# Altium PCB Drude-panel.PcbDoc
Units mm, origin at the board's own origin, x right, y up, seen from the top; angles counter-clockwise.
Board outline 151.98 x 85.9 mm, 4 copper layers (Top Layer, GND, Supply, Bottom Layer), stack 1.52 mm thick; 8 components, 0 nets, 12 pads, 0 vias.
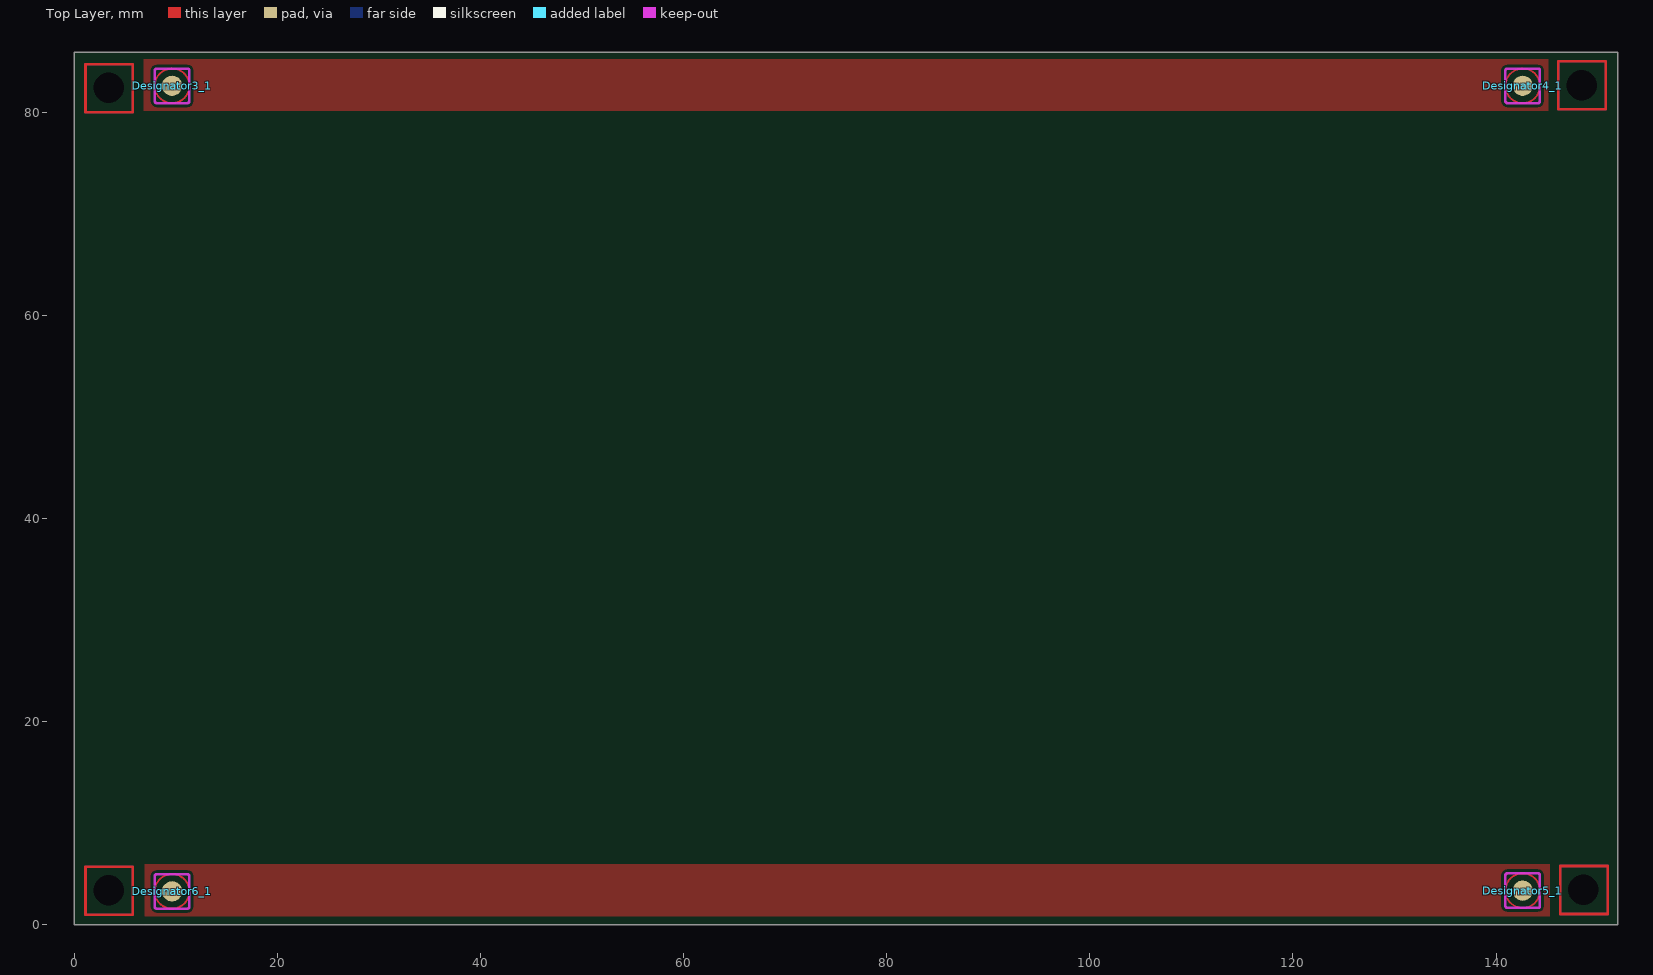
[diagram p0: Top Layer view]
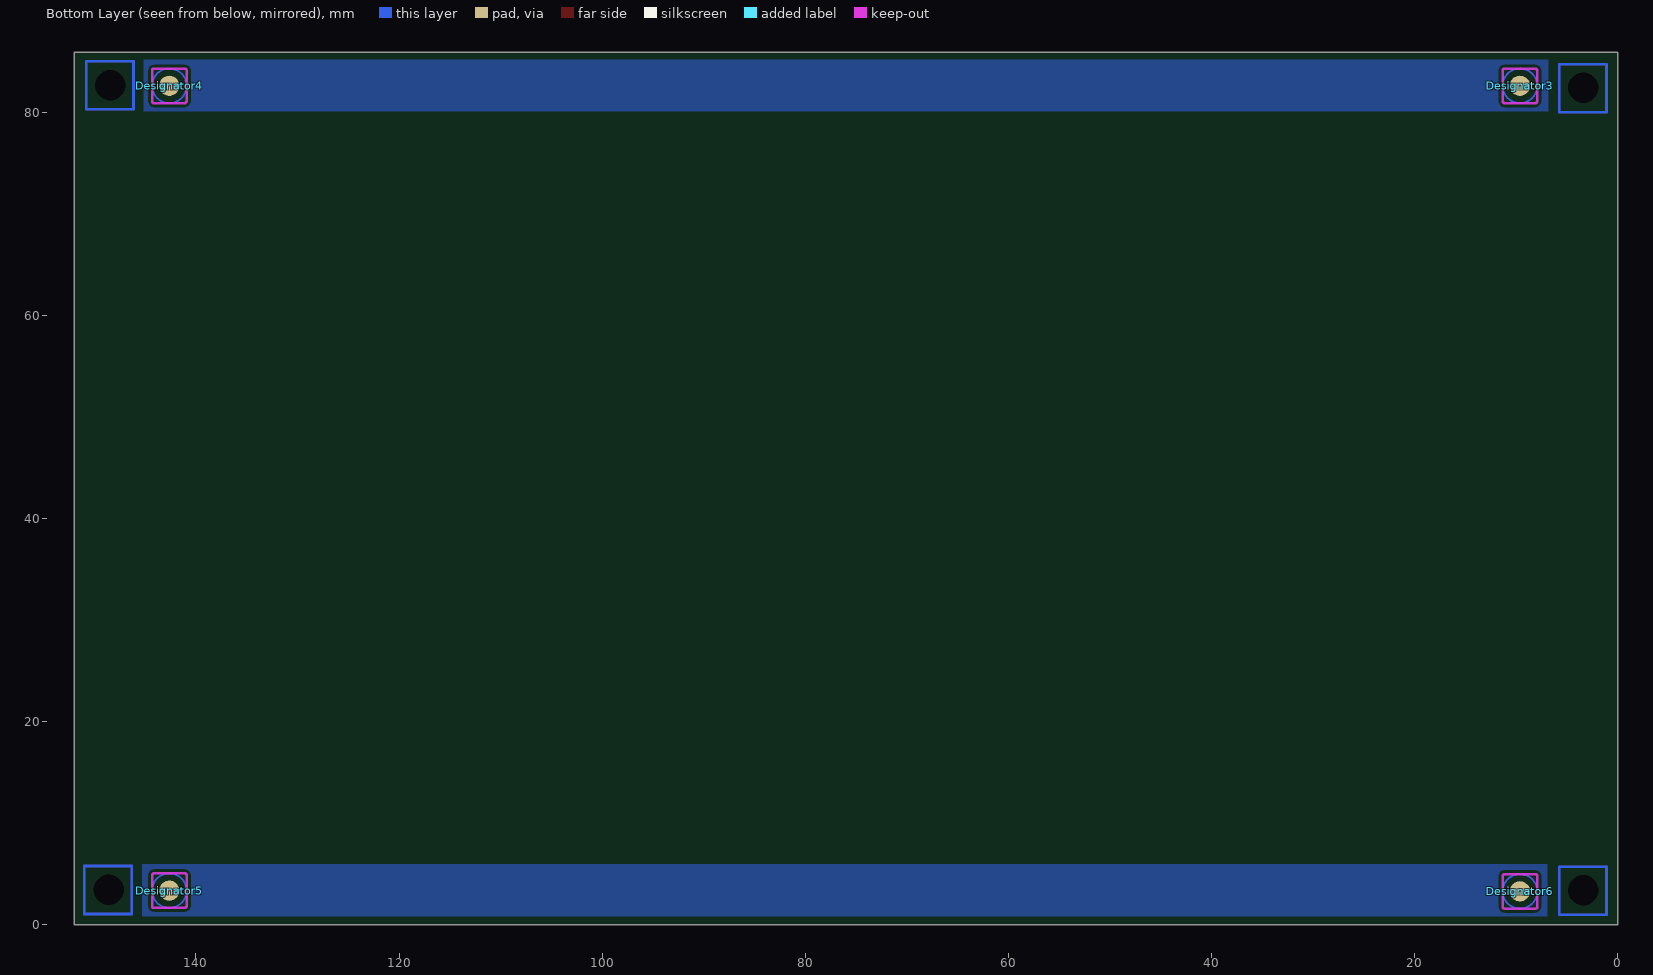
[diagram p1: Bottom Layer view, seen from below]
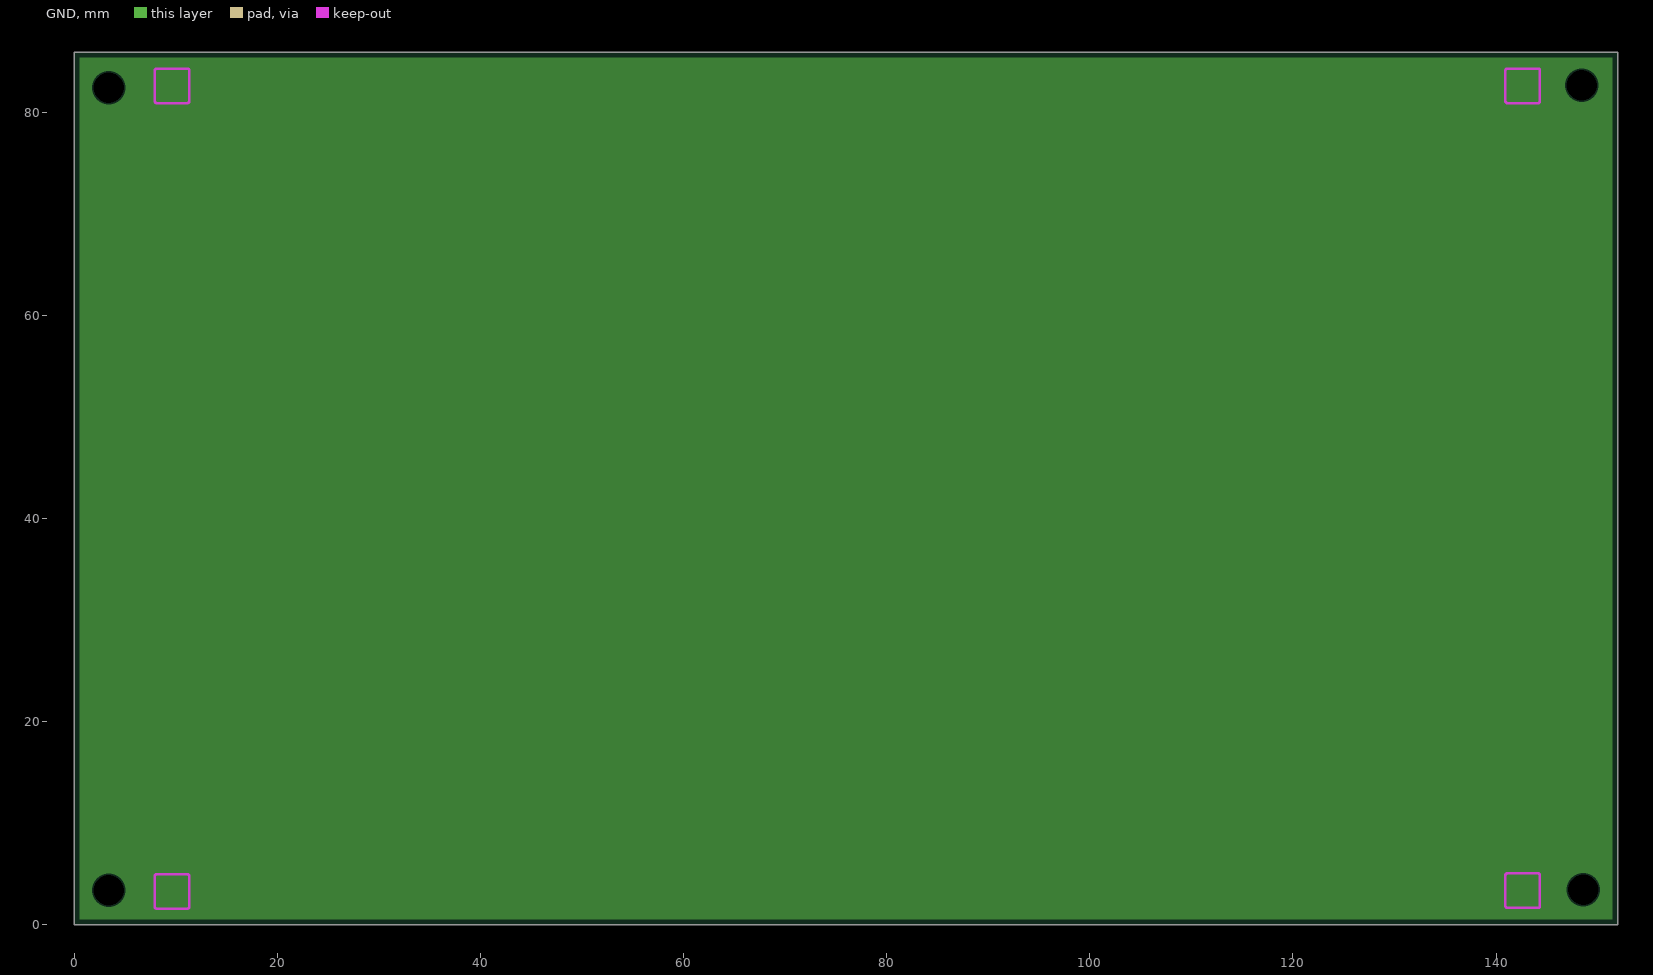
[diagram p2: GND, clearances drawn from the general rule]
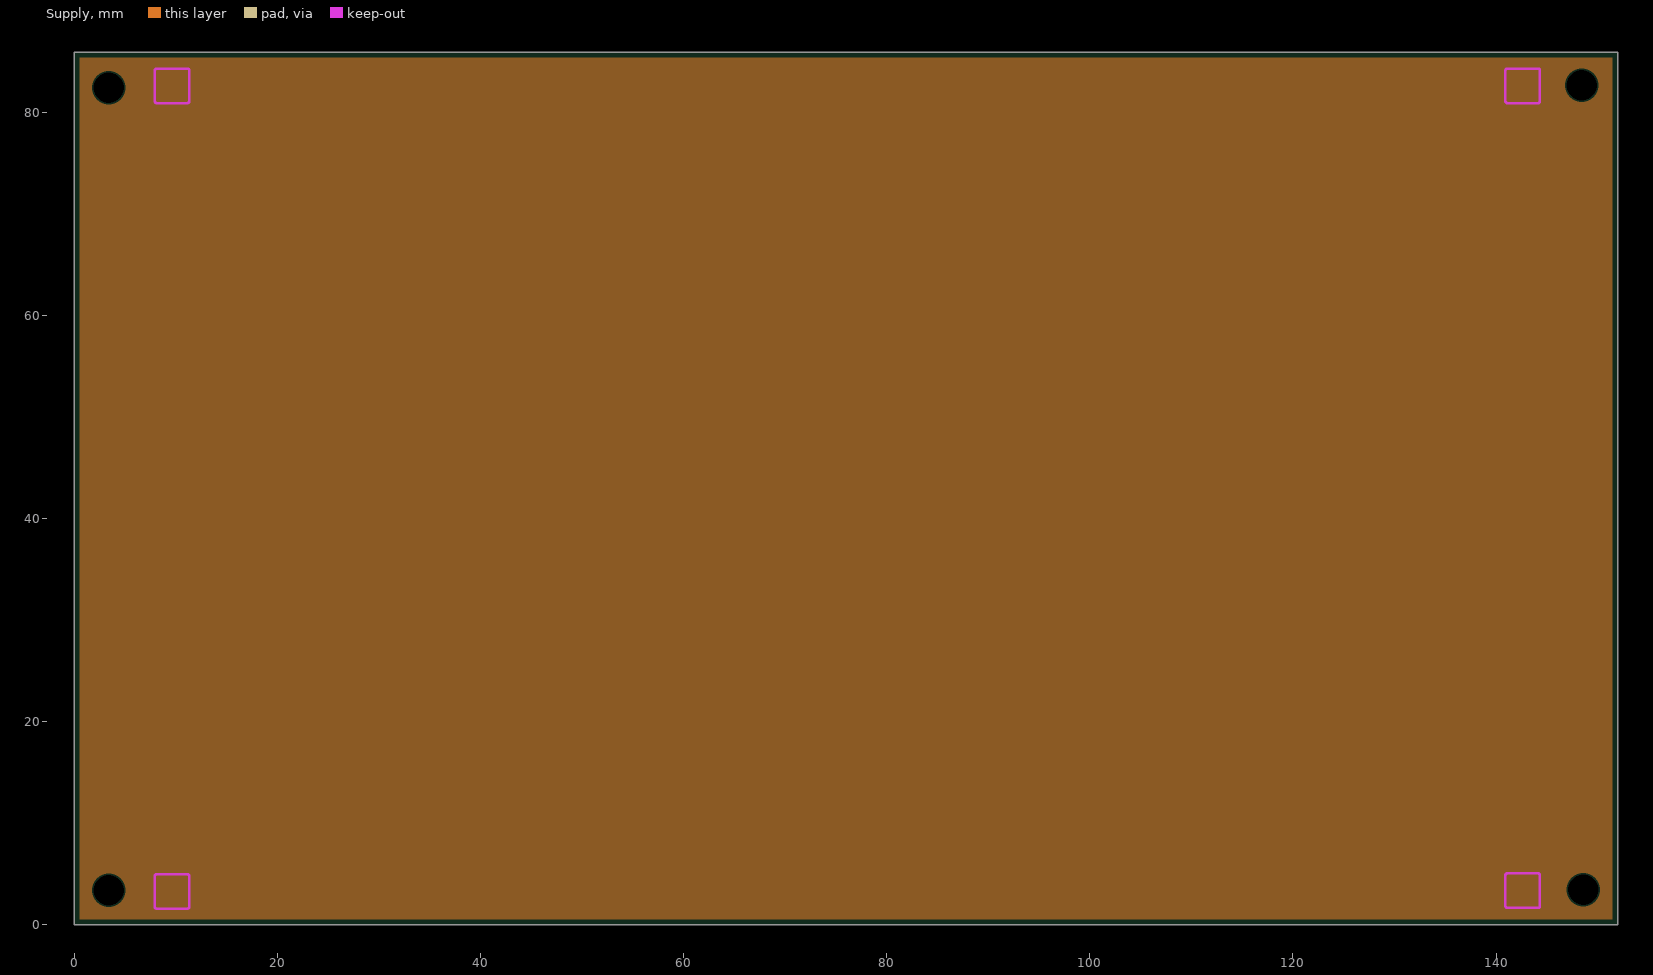
[diagram p3: Supply, clearances drawn from the general rule]

## Layer stack, top to bottom
Top Solder: solder mask 0.0102, Solder Resist, Dk 3.5
Top Layer: signal copper 0.0356
Dielectric 1: prepreg 0.0889, FR-4 TG170, Dk 4.6
GND: plane copper 0.0356
Dielectric 3: core 1.2002, FR-4 TG170, Dk 4.6
Supply: plane copper 0.0356
Dielectric 2: prepreg 0.0889, FR-4 TG170, Dk 4.6
Bottom Layer: signal copper 0.0356
Bottom Solder: solder mask 0.0102, Solder Resist, Dk 3.5

## Board outline
0,0 0,85.9 151.978,85.9 151.978,0

## Design rules (kind name [scope] priority, off if disabled: settings)
AcuteAngle [All] p1: minimum=6.00000000000000E+0001 checktracksonly=FALSE
BoardOutlineClearance [All] p1: gap=0.254
Clearance Clearance_DisplayConn [WithinRoom('RoomDisplayConnector')] p1: gap=0.102
Clearance "Part Q1" [InComponent(Q1)] p2: gap=0.102
Clearance Clearance_Rooms [WithinRoom('RoomTC')    or WithinRoom('RoomIP') or WithinRoom('RoomHDMIConn')] p3: gap=0.102
Clearance Clearance_100rDiff [InNetClass('DSI')  or InNetClass('HDMI')   or InNetClass('HDMI_CONN')] p4: gap=0.203 except(0.102: Via-Via)
Clearance Clearance_90rDiff [InNetClass('USB')] p5: gap=0.203 except(0.102: Via-Via)
Clearance Clearance_100rDiffOtherNets [InNetClass('DSI')  or InNetClass('HDMI')   or InNetClass('HDMI_CONN')] p6: gap=0.61
Clearance [All] p7: gap=0.152
ComponentClearance ComponentClearance_Connectors [InComponentClass('Connectors')] p1: gap=0.025 collisioncheckmode=3 verticalgap=0.254 showdistances=FALSE
ComponentClearance [All] p2: gap=0.254 collisioncheckmode=3 verticalgap=0.254 showdistances=FALSE
DiffPairsRouting DiffPairsRouting_90r [InDifferentialPairClass('USB')] p1: maxlimit=0.203 minlimit=0.203 mostfreqgap=0.203 toplayer_minwidth=0.127 toplayer_maxwidth=0.127 toplayer_prefwidth=0.127 bottomlayer_minwidth=0.127 bottomlayer_maxwidth=0.127 bottomlayer_prefwidth=0.127 maxuncoupledlength=5.334
DiffPairsRouting DiffPairsRouting_DSI [InDifferentialPairClass('DSI')] p2: maxlimit=0.203 minlimit=0.203 mostfreqgap=0.203 toplayer_minwidth=0.102 toplayer_maxwidth=0.102 toplayer_prefwidth=0.102 bottomlayer_minwidth=0.102 bottomlayer_maxwidth=0.102 bottomlayer_prefwidth=0.102 maxuncoupledlength=9.144
DiffPairsRouting DiffPairsRouting_HDMI [InDifferentialPairClass('HDMI')] p3: maxlimit=0.203 minlimit=0.203 mostfreqgap=0.203 toplayer_minwidth=0.102 toplayer_maxwidth=0.102 toplayer_prefwidth=0.102 bottomlayer_minwidth=0.102 bottomlayer_maxwidth=0.102 bottomlayer_prefwidth=0.102 maxuncoupledlength=3.556
DiffPairsRouting DiffPairsRouting_short [All] p4: maxlimit=0.229 minlimit=0.203 mostfreqgap=0.203 toplayer_minwidth=0.102 toplayer_maxwidth=0.127 toplayer_prefwidth=0.102 bottomlayer_minwidth=0.102 bottomlayer_maxwidth=0.127 bottomlayer_prefwidth=0.102 maxuncoupledlength=5.334
HoleSize [All] p1: absolutevalues=TRUE maxlimit=2540 minlimit=0.203 maxpercent=80.000 minpercent=20.000
HoleToHoleClearance [All] p1: gap=0.203 allowstackedmicrovias=TRUE
MatchedLengths MatchLengths_L5_Passives_U9 [InxSignalClass('xSignals_L5_Passives_U9_MatchLengthsClass')] p1: tolerance=2.54 checknetsindiffpair=FALSE checkdiffpairvsdiffpair=TRUE checkxsignals=TRUE checkothers=TRUE
MatchedLengths MatchLengths_xSignals_L5_Passives [InxSignalClass('xSignals_L5_Passives_MatchLengthsClass')] p2: tolerance=2.54 checknetsindiffpair=FALSE checkdiffpairvsdiffpair=TRUE checkxsignals=TRUE checkothers=TRUE
MatchedLengths MatchLengths_xSignals_L5_U9 [InxSignalClass('xSignals_L5_U9_MatchLengthsClass')] p3: tolerance=2.54 checknetsindiffpair=FALSE checkdiffpairvsdiffpair=TRUE checkxsignals=TRUE checkothers=TRUE
MatchedLengths MatchLengths_J2_Passives_U9 [InxSignalClass('xSignals_J2_Passives_U9_MatchLengthsClass')] p4: tolerance=2.54 checknetsindiffpair=FALSE checkdiffpairvsdiffpair=TRUE checkxsignals=TRUE checkothers=TRUE
MatchedLengths MatchLengths_xSignals_J2_Passives [InxSignalClass('xSignals_J2_Passives_MatchLengthsClass')] p5: tolerance=2.54 checknetsindiffpair=FALSE checkdiffpairvsdiffpair=TRUE checkxsignals=TRUE checkothers=TRUE
MatchedLengths MatchLengths_xSignals_J2_U9 [InxSignalClass('xSignals_J2_U9_MatchLengthsClass')] p6: tolerance=2.54 checknetsindiffpair=FALSE checkdiffpairvsdiffpair=TRUE checkxsignals=TRUE checkothers=TRUE
MatchedLengths MatchedLengths-DSI_Group [InNetClass('DSI')] p7: tolerance=0.025 checknetsindiffpair=FALSE checkdiffpairvsdiffpair=TRUE checkxsignals=TRUE checkothers=TRUE
MatchedLengths MatchedLengths-DSI [InNetClass('DSI')] p8: tolerance=0.025 checknetsindiffpair=TRUE checkdiffpairvsdiffpair=FALSE checkxsignals=FALSE checkothers=FALSE
MatchedLengths MatchedLengths-HDMI [InNetClass('HDMI')] p9: tolerance=0.025 checknetsindiffpair=TRUE checkdiffpairvsdiffpair=FALSE checkxsignals=FALSE checkothers=FALSE
MatchedLengths MatchedLengths-HDMI_CONN [InNetClass('HDMI_CONN')] p10: tolerance=0.025 checknetsindiffpair=TRUE checkdiffpairvsdiffpair=FALSE checkxsignals=FALSE checkothers=FALSE
MinimumAnnularRing [All] p1: minimumring=0.102
MinimumSolderMaskSliver [All] p1: minsoldermaskwidth=0.102
ParallelSegment ParallelSegment_USB_8 [(InDifferentialPairClass('USB')) vs (InDifferentialPairClass('USB'))] p1: limit=76.2 gap=0.203
ParallelSegment ParallelSegment_USB_15 [(InDifferentialPairClass('USB')) vs (InDifferentialPairClass('USB'))] p2: limit=7.62 gap=0.203
ParallelSegment ParallelSegment_Lane2 [InDifferentialPair('LANE2') vs InDifferentialPair('LANE2')] p3: limit=76.2 gap=0.203
ParallelSegment ParallelSegment_Lane3 [InDifferentialPair('LANE3') vs InDifferentialPair('LANE3')] p4: limit=76.2 gap=0.203
ParallelSegment ParallelSegment_Lane1 [InDifferentialPair('LANE1') vs InDifferentialPair('LANE1')] p5: limit=76.2 gap=0.203
ParallelSegment ParallelSegment_Lane0 [InDifferentialPair('LANE0') vs InDifferentialPair('LANE0')] p6: limit=76.2 gap=0.203
ParallelSegment ParallelSegment_DSI_CLK [InDifferentialPair('DSI_CLK') vs InDifferentialPair('DSI_CLK')] p7: limit=76.2 gap=0.203
ParallelSegment ParallelSegment_HDMI_D1 [InDifferentialPair('HDMI_D1') vs InDifferentialPair('HDMI_D1')] p8: limit=76.2 gap=0.203
ParallelSegment ParallelSegment_HDMI_D0 [InDifferentialPair('HDMI_D0') vs InDifferentialPair('hdmi_d0')] p9: limit=76.2 gap=0.203
ParallelSegment ParallelSegment_HDMI_D2 [InDifferentialPair('hdmi_d2') vs InDifferentialPair('hdmi_d2')] p10: limit=76.2 gap=0.203
ParallelSegment ParallelSegment_HDMI_CK [InDifferentialPair('HDMI_CK') vs InDifferentialPair('HDMI_CK')] p11: limit=76.2 gap=0.203
ParallelSegment ParallelSegment_HDMI_CON_CK [InDifferentialPair('HDMI_CON_CK') vs InDifferentialPair('HDMI_CON_CK')] p12: limit=76.2 gap=0.203
ParallelSegment ParallelSegment_HDMI_CON_D1 [InDifferentialPair('HDMI_CON_D1') vs InDifferentialPair('HDMI_CON_D1')] p13: limit=76.2 gap=0.203
ParallelSegment ParallelSegment_HDMI_CON_D0 [InDifferentialPair('HDMI_CON_D0') vs InDifferentialPair('HDMI_CON_D0')] p14: limit=76.2 gap=0.203
ParallelSegment ParallelSegment_HDMI_CON_D0_1 [InDifferentialPair('HDMI_CON_D2') vs InDifferentialPair('HDMI_CON_D2')] p15: limit=76.2 gap=0.203
ParallelSegment ParallelSegment_long [(InDifferentialPairClass('All Differential Pairs'))] p16: limit=2.692 gap=0.61
PasteMaskExpansion [All] p1: expansion=-0.025
PlaneClearance PlaneClearanceDifferential [InNetClass('DSI')] p1: clearance=0.178
PlaneClearance [All] p2: clearance=0.152
PlaneConnect PowerPlaneConnect [InNet('+12V')] p1: planeconnectstyle=Relief reliefexpansion=0.508 reliefentries=4 reliefconductorwidth=0.61 reliefairgap=0.254
PlaneConnect PlaneConnect_Via [IsVia] p2: planeconnectstyle=Direct reliefexpansion=0.508 reliefentries=4 reliefconductorwidth=0.254 reliefairgap=0.254
PlaneConnect [All] p3: planeconnectstyle=Relief reliefexpansion=0.508 reliefentries=4 reliefconductorwidth=0.254 reliefairgap=0.254
PolygonConnect ThermalVias [IsVia] p1: connectstyle=Direct reliefconductorwidth=0.254 reliefentries=4 polygonreliefangle="90 Angle" airgapwidth=0.254
PolygonConnect PolygonConnect_no_connect [IsNamedPolygon('No-Connect')] p2: connectstyle=NoConnect reliefconductorwidth=0.61 reliefentries=4 polygonreliefangle="90 Angle" airgapwidth=0.254
PolygonConnect "Direct Connect" [IsNamedPolygon('Direct-Connect')] p3: connectstyle=Direct reliefconductorwidth=0.254 reliefentries=4 polygonreliefangle="90 Angle" airgapwidth=0.254
PolygonConnect [All] p4: connectstyle=Relief reliefconductorwidth=0.254 reliefentries=4 polygonreliefangle="90 Angle" airgapwidth=0.254
RoutingCorners [All] p1: cornerstyle=45-Degree minsetback=0.762 maxsetback=0.762
RoutingVias RoutingVias_DSI [InNetClass('DSI')] p1: holewidth=0.203 width=0.406 viastyle="Through Hole" minholewidth=0.203 minwidth=0.406 maxholewidth=0.203 maxwidth=0.406
RoutingVias [All] p2: holewidth=0.381 width=0.762 viastyle="Through Hole" minholewidth=0.203 minwidth=0.406 maxholewidth=0.711 maxwidth=1.27
SMDEntry [0=1] p1: side=TRUE corner=TRUE anyangle=FALSE
SMDToCorner [All] p1: distance=30000
SilkToSilkClearance [All] p1 off: silktosilkclearance=0.254
SilkToSolderMaskClearance [IsPad] p1 off: minsilkscreentomaskgap=0.254 clearancetoexposedcopper=TRUE
SolderMaskExpansion ViaTent [(IsVia)  And (HoleDiameter < 0.635   )] p1: expansion=-1.27
SolderMaskExpansion SolderMaskExpansion_Via [IsVia] p2: expansion=-0.406
SolderMaskExpansion [All] p3: expansion=0.076
Width Width_100rDiff [InNetClass('DSI')  or InNetClass('HDMI')   or InNetClass('HDMI_CONN')] p1: maxlimit=0.145 minlimit=0.102 preferedwidth=0.145 minimp=50.000000 maximp=50.000000 favimp=50.000000
Width Width_90rDiff [InNetClass('USB')] p2: maxlimit=0.127 minlimit=0.127 preferedwidth=0.127 minimp=50.000000 maximp=50.000000 favimp=50.000000
Width [All] p3: maxlimit=2.54 minlimit=0.127 preferedwidth=0.203 minimp=50.000000 maximp=50.000000 favimp=50.000000
19 further rules are at their usual default settings.

## Components (designator, comment, footprint, x,y, rotation, side; value= is the part's Value field where it differs from the comment)
Designator3 "Comment" FIDUCIAL-2X3-PANEL 9.625,82.598 r90 bottom
Designator3_1 "Comment" FIDUCIAL-2X3-PANEL 9.625,82.598 r90 top
Designator4 "Comment" FIDUCIAL-2X3-PANEL 142.624,82.598 r90 bottom
Designator4_1 "Comment" FIDUCIAL-2X3-PANEL 142.624,82.598 r90 top
Designator5 "Comment" FIDUCIAL-2X3-PANEL 142.624,3.35 r90 bottom
Designator5_1 "Comment" FIDUCIAL-2X3-PANEL 142.624,3.35 r90 top
Designator6 "Comment" FIDUCIAL-2X3-PANEL 9.625,3.275 r90 bottom
Designator6_1 "Comment" FIDUCIAL-2X3-PANEL 9.625,3.275 r90 top

## Footprints (in the part's own frame and the unit in brackets; to place one, negate y for a bottom-side part, rotate by r counter-clockwise, add the part's x,y. Pads: shape width x height; smd on the part's side, far side on the other; paste and mask are expansions set on the pad)
FIDUCIAL-2X3-PANEL [mm]
  rrect100% 2x2 smd paste+0 mask+0.508: 1(0,0)
  Top Layer circle w0.178: c0,0 r1.7
  Keep-Out Layer region: -1.5,-1.7 -1.577,-1.685 -1.641,-1.641 -1.685,-1.577 -1.7,-1.5 -1.7,-1.5 -1.7,1.5 -1.685,1.577 -1.641,1.641 -1.577,1.685 -1.5,1.7 -1.5,1.7 1.5,1.7 1.577,1.685 1.641,1.641 1.685,1.577 1.7,1.5 1.7,1.5 1.7,-1.5 1.685,-1.577 1.641,-1.641 1.577,-1.685 1.5,-1.7 1.5,-1.7
  Keep-Out Layer lines w0.254: -1.5,-1.7 cw(c-1.5,-1.5) -1.7,-1.5 -1.7,1.5 cw(c-1.5,1.5) -1.5,1.7 1.5,1.7 cw(c1.5,1.5) 1.7,1.5 1.7,-1.5 cw(c1.5,-1.5) 1.5,-1.7 -1.5,-1.7
  body extent -1.02,-1.02 1.02,1.02, height 0.02

## Free pads (board coordinates)
  round 0 hole 3 unplated paste-99 mask-0.102: 0(3.375,3.375) 1(148.602,3.45) 2(148.422,82.677) 3(3.375,82.395)

## Nets (pads, with @x,y where several pads share a name; then routed paths per layer and width w, separated by ;. In a path a pad name is that pad's centre, name@x,y a point inside that pad or via, vN(x,y) a via of type N, cw(c..) or ccw(c..) an arc to the next point about the centre after c; other vN are vias at no path point)
pads on no net: Designator3.1 Designator3_1.1 Designator4.1 Designator4_1.1 Designator5.1 Designator5_1.1 Designator6.1 Designator6_1.1
copper on no net: | length 150.4
  Top Layer w0.254: 1.1,0.975 5.775,0.975 5.775,5.7 1.1,5.7 1.1,0.975 ; 1.1,79.995 1.1,84.72 5.775,84.72 5.775,79.995 1.1,79.995 ; 146.136,80.277 150.823,80.277 150.823,85.002 146.136,85.002 146.136,80.277 ; 146.328,1.05 151.003,1.05 151.003,5.775 146.328,5.775 146.328,1.05
  Bottom Layer w0.254: 1.1,0.975 5.775,0.975 5.775,5.7 1.1,5.7 1.1,0.975 ; 1.1,79.995 5.775,79.995 5.775,84.72 1.1,84.72 1.1,79.995 ; 146.148,80.277 150.823,80.277 150.823,85.002 146.148,85.002 146.148,80.277 ; 146.328,1.05 146.328,5.775 151.003,5.775 151.003,1.05 146.328,1.05

## Polygon pours and split planes (outlines as drawn)
no net on Top Layer "Frame-Copper" (solid, pour order 39): 6.858,80.127 145.165,80.127 145.165,85.202 6.858,85.202
no net on Top Layer "Frame-Copper" (solid, pour order 41): 6.95,0.85 145.288,0.85 145.288,5.925 6.95,5.925
no net on Bottom Layer "Frame-Copper" (solid, pour order 38): 6.858,80.103 145.165,80.103 145.165,85.178 6.858,85.178
no net on Bottom Layer "Frame-Copper" (solid, pour order 40): 6.95,0.85 145.288,0.85 145.288,5.925 6.95,5.925
no net on Supply (split plane): 151.468,0.51 0.51,0.51 0.51,85.39 151.468,85.39
no net on GND (split plane): 151.468,0.51 0.51,0.51 0.51,85.39 151.468,85.39

## Silkscreen, mask and mechanical layers (free items; w line width, h text height)
Mechanical 2:
  drawing of 295 lines, arcs and shapes, not listed
  text "NOTES (UNLESS SPECIFIED OTHERWISE)" at 160.02,132.08 h1.52
  text "1. FABRICATE PCB IN ACCORDANCE WITH IPC-A-600 CLASS 2 (LATEST REVISION)" at 162.56,129.54 h1.52
  text "2. THE PCB MUST BE LEAD FREE ASSEMBLY PROCESS COMPATIBLE." at 162.56,124.46 h1.52
  text "MUST HANDLE MINIMUM 6 CYCLES - 260C FOR 10 SECONDS." at 167.64,121.92 h1.52
  text "3. LAMINATE AND PREPREG TO BE FR4 TG170" at 162.56,116.84 h1.52
  text "4. PLATING FINISH - BOTH SIDES ENIG GOLD PLATED" at 162.56,111.76 h1.52
  text "5. SOLDERMASK - BOTH SIDES GREEN" at 162.56,106.68 h1.52
  text "6. SOLDER SAMPLES TO BE PROVIDED" at 162.56,101.6 h1.52
  text "7. FINISHED PCB MUST BE MANELIZED FOR ASSEMBLY." at 162.56,96.52 h1.52
  text "8. SILKSCREEN - WHITE EPOXY INK, BOTH SIDES. NO SILK ON PADS" at 162.56,91.44 h1.52
  text "9. SUPPLIER MARKING - ON SOLDER SIDE" at 162.56,86.36 h1.52
  text "ADD ROHS LOGO" at 167.64,83.82 h1.52
  text "ADD UL MARKING AND ID" at 167.64,81.28 h1.52
  text "10. LAYER STACKUP - SEE DETAIL A" at 162.56,76.2 h1.52
  text "11. CONTROLLED IMPEDANCE - MEET THE FOLLOWING IMPEDANCE REQUIREMENTS" at 162.56,71.12 h1.52
  text "MODIFY DIELECTRICS / LINES AS NEEDED FOR PROCESS" at 167.64,68.58 h1.52
  text "NOTIFY US OF DIELECTRIC, STACKUP, AND TRACE CHANGES" at 167.64,66.04 h1.52
  text "ADD TEST COUPON TO PANEL RAIL" at 167.64,63.5 h1.52
  text "GTL, GBL - DIFFERENTIAL TRACE" at 167.64,58.42 h1.52
  text "4 MIL WIDTH, 8 MIL SPACE = 100 OHM DIFF" at 167.64,55.88 h1.52
  text "5 MIL WIDTH, 8 MIL SPACE = 90 OHM DIFF" at 167.64,53.34 h1.52
  text "Z = +/- 10%" at 167.64,50.8 h1.52
  text "DETAIL A" at 162.56,40.64 h1.78
  text "Layer" at 172.602,36.449 h1.52
  text "Name" at 183.013,36.449 h1.52
  text "Material" at 206.629,36.449 h1.52
  text "Thickness" at 228.467,36.449 h1.52
  text "Constant" at 244.973,36.449 h1.52
  text "Board Layer Stack" at 259.447,36.449 h1.52
  text "File" at 164.925,36.398 h1.52
  text "1" at 172.602,33.401 h1.52
  text "Top Overlay" at 183.013,33.401 h1.52
  text "GTO" at 165.174,33.001 h1.52
  text "2" at 172.602,30.353 h1.52
  text "Top Solder" at 183.013,30.353 h1.52
  text "Solder Resist" at 206.629,30.353 h1.52
  text "0.010mm" at 228.467,30.353 h1.52
  text "3.5" at 244.973,30.353 h1.52
  text "GTS" at 165.174,29.953 h1.52
  text "3" at 172.602,27.305 h1.52
  text "Top Layer" at 183.013,27.305 h1.52
  text "Copper" at 206.629,27.305 h1.52
  text "0.036mm" at 228.467,27.305 h1.52
  text "GTL" at 165.174,26.905 h1.52
  text "4" at 172.602,24.257 h1.52
  text "Dielectric 1" at 183.013,24.257 h1.52
  text "FR-4 TG170" at 206.629,24.257 h1.52
  text "0.089mm" at 228.467,24.257 h1.52
  text "4.6" at 244.973,24.257 h1.52
  text "5" at 172.602,21.209 h1.52
  text "GND" at 183.013,21.209 h1.52
  text "Copper" at 206.629,21.209 h1.52
  text "0.036mm" at 228.467,21.209 h1.52
  text "GP1" at 165.174,20.809 h1.52
  text "6" at 172.602,18.161 h1.52
  text "Dielectric 3" at 183.013,18.161 h1.52
  text "FR-4 TG170" at 206.629,18.161 h1.52
  text "1.200mm" at 228.467,18.161 h1.52
  text "4.6" at 244.973,18.161 h1.52
  text "7" at 172.602,15.113 h1.52
  text "Supply" at 183.013,15.113 h1.52
  text "Copper" at 206.629,15.113 h1.52
  text "0.036mm" at 228.467,15.113 h1.52
  text "GP2" at 165.174,14.713 h1.52
  text "8" at 172.602,12.065 h1.52
  text "Dielectric 2" at 183.013,12.065 h1.52
  text "FR-4 TG170" at 206.629,12.065 h1.52
  text "0.089mm" at 228.467,12.065 h1.52
  text "4.6" at 244.973,12.065 h1.52
  text "GBL" at 165.174,9.125 h1.52
  text "9" at 172.602,9.017 h1.52
  text "Bottom Layer" at 183.013,9.017 h1.52
  text "Copper" at 206.629,9.017 h1.52
  text "0.036mm" at 228.467,9.017 h1.52
  text "10" at 172.602,5.969 h1.52
  text "Bottom Solder" at 183.013,5.969 h1.52
  text "Solder Resist" at 206.629,5.969 h1.52
  text "0.010mm" at 228.467,5.969 h1.52
  text "3.5" at 244.973,5.969 h1.52
  text "GBS" at 165.174,5.569 h1.52
  text "11" at 172.602,2.921 h1.52
  text "Bottom Overlay" at 183.013,2.921 h1.52
  text "GBO" at 165.151,2.819 h1.52
Panel Dimension:
  the board outline again, w0.254
V-Score:
  lines w0.254: 0,6.45 151.978,6.45 ; 0,79.45 151.978,79.45
Cutout-Route:
  lines w0.013: 151.978,8.45 cw(c149.978,8.45) 149.978,6.45 151.978,6.45 151.978,8.45 ; 151.978,8.45 151.978,77.45 ; 151.978,77.45 ccw(c149.978,77.45) 149.978,79.45 151.978,79.45 151.978,77.45 ; 47.813,6.45 ccw(c47.813,8.45) 49.813,8.45 49.813,77.45 ccw(c47.813,77.45) 47.813,79.45 51.083,79.45 51.083,6.45 47.813,6.45 ; 98.896,6.45 ccw(c98.896,8.45) 100.896,8.45 100.896,77.45 ccw(c98.896,77.45) 98.896,79.45 102.166,79.45 102.166,6.45 98.896,6.45

## Dimensions
151.978,0 to 151.978,85.9 on Mechanical 2
0,0 to 151.978,0 on Mechanical 2

## Panel: embedded boards
"..\Drude\Drude02.PcbDoc" at 0,6.45, 1 rows x 3 columns, spacing 102.87 x 51.083, rotation 0